# Altium PCB Player.PcbDoc (part 2 of 2)
Units mil, origin at the board's own origin, x right, y up, seen from the top; angles counter-clockwise.
Board outline 1181.1 x 2755.91 mil, 6 copper layers (Top Layer, Mid-Layer 1, Mid-Layer 2, Mid-Layer 3, Mid-Layer 4, Bottom Layer); 169 components, 289 nets, 1099 pads, 96 vias.
Unrouted connection lines stored in the file: 590.
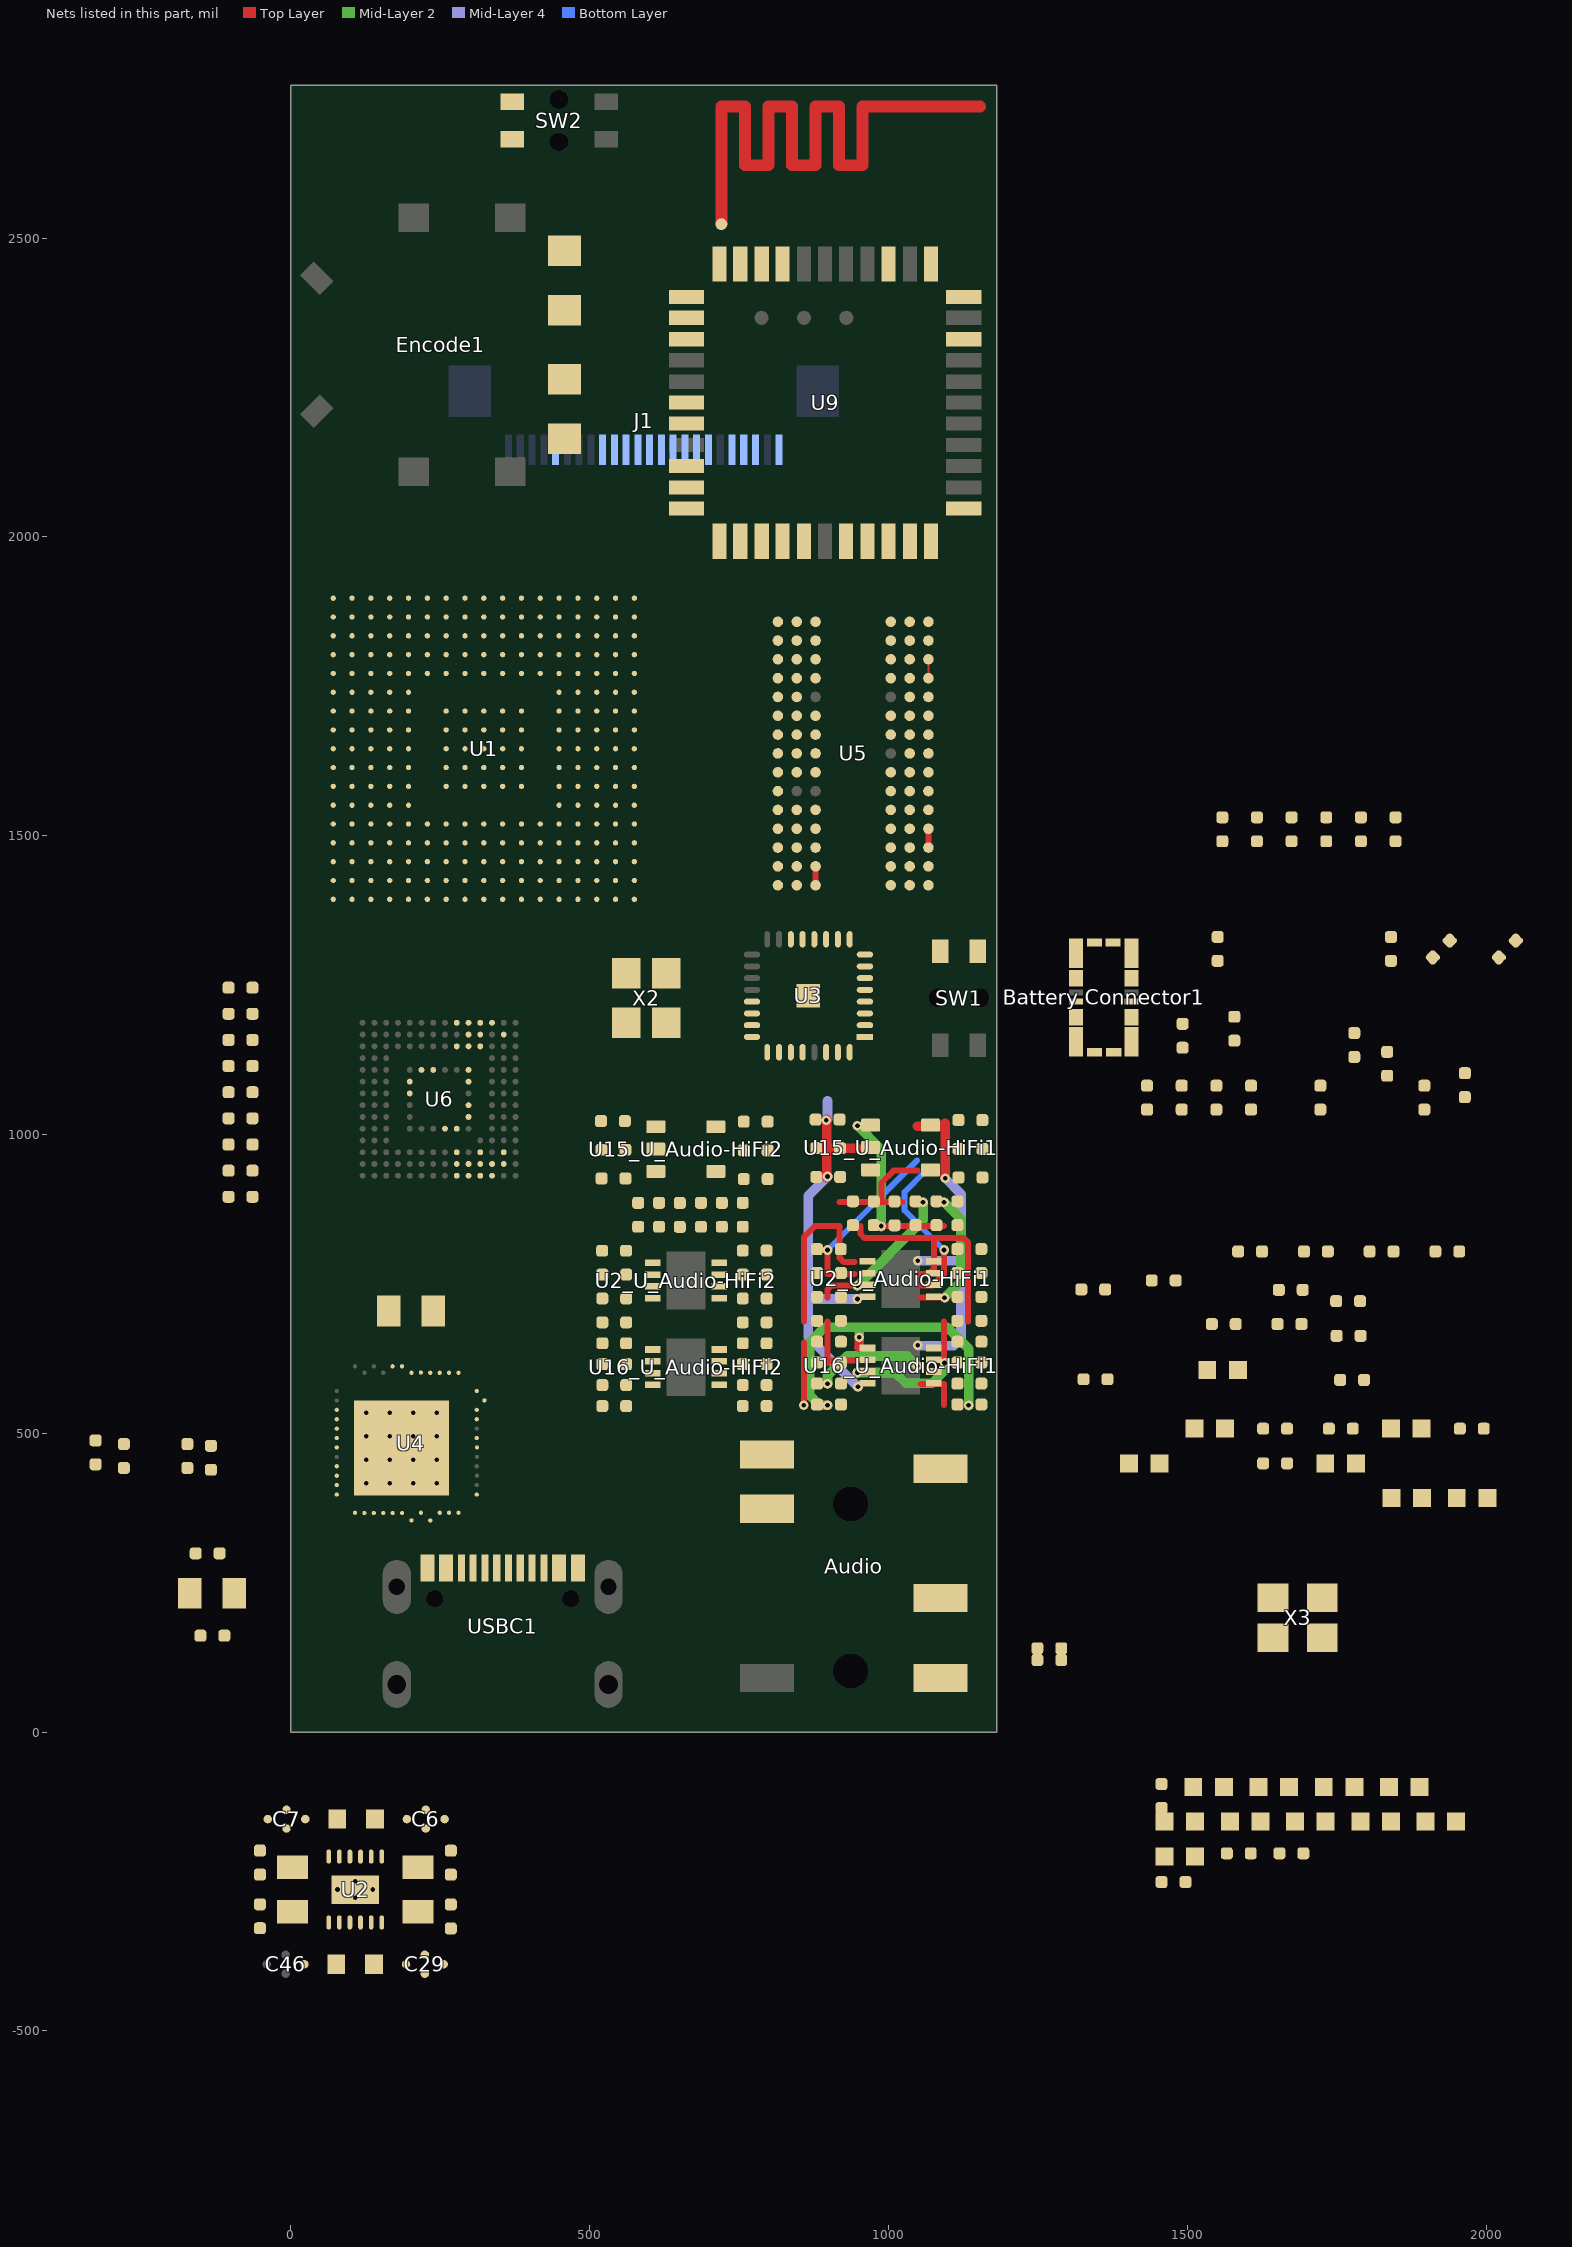
[diagram p4: the nets of this part, all layers, seen from the top]

## Part data
ANT1: "PCB板载天线", BOM名称=PCB板载天线, 当前库版本V2023.8.14 @淘宝卖家:黄晶宝石=最新版本发布https://item.taobao.com/item.htm?id=566775463719, 联系下单店铺卖家 免费技术支持="联系下单店铺卖家 免费帮你查找封装"
Audio: "3.5耳机插座,4Pin", BOM名称=耳机插座, 当前库版本V2023.8.14 @淘宝卖家:黄晶宝石=最新版本发布https://item.taobao.com/item.htm?id=566775463719
B1 B2: library part BEAD
"Battery Connector1": library part BM25-4S/2-V-51, "Battery"
C1 C2 C3 C4 C5 C8 C9 C10 C11 C12 C13 C14 C15 C16 C17 C18 C19 C20 C20_U_Audio-HiFi1 C20_U_Audio-HiFi2 C21 C22 C23 C24 C25 C26 C27 C28 C30 C31 C32 C33 C34 C35 C36 C37 C38 C39 C40 C40_U_Audio-HiFi1 C40_U_Audio-HiFi2 C41 C42 C43 C44 C45 C53_U_Audio-HiFi1 C53_U_Audio-HiFi2 C58 C59 C60 C61 C62 C63 C64 C65 C66 C67 C68 C69 C70 C71 C72 C72_U_Audio-HiFi1 C72_U_Audio-HiFi2 C73 C73_U_Audio-HiFi1 C73_U_Audio-HiFi2 C74 C74_U_Audio-HiFi1 C74_U_Audio-HiFi2 C75 C75_U_Audio-HiFi1 C75_U_Audio-HiFi2 C76 C76_U_Audio-HiFi1 C76_U_Audio-HiFi2 C77 C77_U_Audio-HiFi1 C77_U_Audio-HiFi2 C78 C78_U_Audio-HiFi1 C78_U_Audio-HiFi2 C83_U_Audio-HiFi1 C83_U_Audio-HiFi2 C84_U_Audio-HiFi1 C84_U_Audio-HiFi2: library part 电容-0402, "Capacitor"
C6 C7 C29 C46: library part CMP-06053-000028-1, "CAP FEEDTHRU 1UF 20% 6.3V 0603", Capacitance=1uF, Case Code (Imperial)=0603, Case Code (Metric)=1608, Current=2A, DC Resistance (DCR)=30mR, Max Operating Temperature=125°C, Min Operating Temperature=-55°C, Package Quantity=4000, Tolerance=20%, Voltage Rating=6.3V, Case/Package=0603, Height=0.028inch, Length=0.063inch, Mount="Surface Mount", Packaging="Tape and Reel", Voltage Rating (DC)=6.3V, Width=0.031inch
Encode1: JLCPCB Part Class="Extended Part", LCSC Part Name=拨轮滚轮旋转编码器开关, Manufacturer=MITSUMI(美上美), Add into BOM=yes, Convert to PCB=yes, Datasheet=https://atta.szlcsc.com/upload/public/pdf/source/20220728/2FBC1A98A06DC86460FC69DAE20456FC.pdf, DEVICE=SIQ-02FVS3, Manufacturer Part=SIQ-02FVS3, Supplier=LCSC, Supplier Footprint=SMD, Supplier Part=C2925423, Symbol=SIQ-02FVS3
J1: "鱼鹰光电"
L1 L2 L3 L4: library part L, "贴片小功率电感", BOM名称=小功率贴片电感, 联系下单店铺卖家 免费帮你查找封装="联系下单店铺卖家 免费技术支持"
R1 R2 R8 R9 R10 R11 R12 R15 R16 R17 R17_U_Audio-HiFi1 R17_U_Audio-HiFi2 R18 R19 R19_U_Audio-HiFi1 R19_U_Audio-HiFi2 R20 R20_U_Audio-HiFi1 R20_U_Audio-HiFi2 R21 R22 R23 R24 R24_U_Audio-HiFi1 R24_U_Audio-HiFi2 R25_U_Audio-HiFi1 R25_U_Audio-HiFi2 R27_U_Audio-HiFi1 R27_U_Audio-HiFi2 R34_U_Audio-HiFi1 R34_U_Audio-HiFi2 R36_U_Audio-HiFi1 R36_U_Audio-HiFi2 R37_U_Audio-HiFi1 R37_U_Audio-HiFi2 R55_U_Audio-HiFi1 R55_U_Audio-HiFi2 R56_U_Audio-HiFi1 R56_U_Audio-HiFi2 R57_U_Audio-HiFi1 R57_U_Audio-HiFi2 R60_U_Audio-HiFi1 R60_U_Audio-HiFi2 R61_U_Audio-HiFi1 R61_U_Audio-HiFi2 R63_U_Audio-HiFi1 R63_U_Audio-HiFi2 R65_U_Audio-HiFi1 R65_U_Audio-HiFi2: library part R, "贴片电阻", BOM名称=贴片电阻
  R1 R2 R8 R9 R10 R11 R12 R15 R16 R17 R18 R19 R20 R21 R22 R23 R24: 联系卖家，免费查找封装=唯一出售店铺网址https://shop463601444.taobao.com
  R17_U_Audio-HiFi1 R17_U_Audio-HiFi2 R19_U_Audio-HiFi1 R19_U_Audio-HiFi2 R20_U_Audio-HiFi1 R20_U_Audio-HiFi2 R24_U_Audio-HiFi1 R24_U_Audio-HiFi2 R25_U_Audio-HiFi1 R25_U_Audio-HiFi2 R27_U_Audio-HiFi1 R27_U_Audio-HiFi2 R34_U_Audio-HiFi1 R34_U_Audio-HiFi2 R36_U_Audio-HiFi1 R36_U_Audio-HiFi2 R37_U_Audio-HiFi1 R37_U_Audio-HiFi2 R55_U_Audio-HiFi1 R55_U_Audio-HiFi2 R56_U_Audio-HiFi1 R56_U_Audio-HiFi2 R57_U_Audio-HiFi1 R57_U_Audio-HiFi2 R60_U_Audio-HiFi1 R60_U_Audio-HiFi2 R61_U_Audio-HiFi1 R61_U_Audio-HiFi2 R63_U_Audio-HiFi1 R63_U_Audio-HiFi2 R65_U_Audio-HiFi1 R65_U_Audio-HiFi2: 联系下单店铺卖家 免费帮你查找封装="联系下单店铺卖家 免费技术支持"
SW1 SW2: "小乌龟-侧按4脚开关 带定位柱", 联系下单店铺卖家 免费技术支持="联系下单店铺卖家 免费帮你查找封装"
U1: library part CMP-12105-000055-1, "HIGH-PERFORMANCE AND DSP WITH DP", Ambient Temperature Range High=+85°C, Ambient Temperature Range Low=-40°C, Frequency=480MHz, Manufacturer=STMicroelectronics, Max Junction Temp=+125°C, Max Supply Voltage=3.6V, Min Supply Voltage=1.2V, Package=TFBGA240+25-A07U, Temperature="-40°C to +125°C", Automotive=No, Category=IC, ComponentLink2Description=Datasheet, ComponentLink2URL=https://www.st.com/resource/en/datasheet/stm32h747xi.pdf, Core Architecture="ARM Cortex-M4, ARM Cortex-M7", Data Bus Width=32bits, Device Class L1="Integrated Circuits (ICs)", Device Class L2="Embedded Processors and Controllers", Device Class L3=Microcontrollers, Digikey Description="HIGH-PERFORMANCE AND DSP WITH DP", Height=1.1mm, Interface=I2C,SPI,UART,USART,CAN,USB,LIN,IrDA,Ethernet,I2S,SMBus,Other, Ipc Land Pattern Name=BGA289N80P17X17_1400X1400X110, Lead Free=Yes, Manufacturer Part Number=STM32H747XIH6, Memory Size=2MBytes, Memory Type=FLASH, Mouser Description="STM32 Series 2 MB Flash 1 MB RAM 480 MHz 32-Bit Microcontroller - TFBGA-265", Number Of A/D Converters=3, Number Of Adc Channels=36, Number Of Cores=2, Number Of Ethernet Channels=1, Number Of I2C Channels=4, Number Of I/Os=168, Number Of Pwm Channels=2, Number Of Spi Channels=6, Number Of Timers/Counters=22, Number Of Uart Channels=9, Number Of Usb Channels=2, Octopart=https://octopart.com/stm32h747xih6-stmicroelectronics-100293943, Ram Size=1MBytes, RoHS=TRUE, Standoff Height=0.15mm, Temperature Range High=+125°C, Temperature Range Low=-40°C
U2: library part CMP-04918-000430-1, "IC REG AMOLED DISPL 2OUT 12WSON", Case/Package=QFN, Max Operating Temperature=85°C, Max Supply Voltage=5V, Min Operating Temperature=-40°C, Min Supply Voltage=2.9V, Output Voltage=-5V, Package Quantity=3000, Lead Free="Lead Free", Mount="Surface Mount", Number of Channels=2, Number of Outputs=2, Number of Pins=12, Packaging="Tape and Reel", Radiation Hardening=No, RoHS Compliant=Yes
U2_U_Audio-HiFi1 U2_U_Audio-HiFi2 U16_U_Audio-HiFi1 U16_U_Audio-HiFi2: "Double Channel Low Power Operational Amplifier, 145 MHz BW, 180 V/us SR, Industrial, 8-pin SOIC (R-8), Reel", Amplifiers Per Package=2, Generic Part Number=AD8066, Input Bias Current=2pA, Input Offset Voltage=400uV, Manufacturer="Analog Devices", Code_JEDEC=MS-012-AA, ComponentLink1Description="Manufacturer URL", ComponentLink1URL=http://www.analog.com/en/index.html, ComponentLink2Description=Datasheet, ComponentLink2URL=http://www.analog.com/static/imported-files/data_sheets/AD8065_8066.pdf, ComponentLink3Description="Package Specification", ComponentLink3URL=http://www.analog.com/static/imported-files/packages/PKG_PDF/SOIC_Narrow%20(R)/R_8.pdf, ComponentLink4Description="Reference Circuit", ComponentLink4URL=http://www.analog.com/en/all-operational-amplifiers-op-amps/operational-amplifiers-op-amps/ad8066/products/product.html#product-recommendations, DatasheetVersion="Rev. J", Iq/Amp=7.4mA, Mounting Technology="Surface Mount", PackageDescription="8-Pin Standard Small Outline Package, Body 3.9 x 4.9 mm, Pitch 1.27 mm", PackageReference=R-8, PackageVersion=060506-A, PartNumber=AD8066ARZ-R7, RevisionNote="Reference Circuit URL fixed", Slew Rate=180V/us, Small Signal Bandwidth=145MHz, V Span Max=24V, V Span Min=5V
U4: library part CMP-1518-00018-3, "IC PMIC BATT PWR SYST 48VQFN", Case/Package=VQFN, Max Operating Temperature=105°C, Min Operating Temperature=-40°C, Nominal Supply Current=2.5A, Operating Supply Voltage=5.8V, Output Current=1.2A, Output Voltage=3.3V, Package Quantity=2500, Lead Free="Lead Free", Max Duty Cycle=100%, Mount="Surface Mount", Number of Outputs=7, Number of Pins=48, Packaging="Tape and Reel", Radiation Hardening=No, RoHS Compliant=Yes
U5: JLCPCB Part Class="Extended Part", Manufacturer=ISSI(美国芯成), Add into BOM=yes, Convert to PCB=yes, Datasheet=https://atta.szlcsc.com/upload/public/pdf/source/20220614/2E4F120B9DE0CAEE6B87FE9099754B7F.pdf, DEVICE=IS42S32800G-6BLI, LCSC Part Name=IS42S32800G-6BLI, Manufacturer Part=IS42S32800G-6BLI, Name=IS42S32800G-6BLI, Supplier=LCSC, Supplier Footprint=TFBGA-90(8x13), Supplier Part=C2920767, Symbol=IS42S32800G-6BLI
U6: Manufacturer=SAMSUNG(三星半导体), Add into BOM=yes, Convert to PCB=yes, Datasheet=https://atta.szlcsc.com/upload/public/pdf/source/20240221/0DCF3FBB535A67C02EC39E54F7AEA7E4.pdf, DEVICE=KLM8G1GETF-B041006_1, LCSC Part Name=KLM8G1GETF-B041006, Manufacturer Part=KLM8G1GETF-B041006, Supplier=LCSC, Supplier Footprint=FBGA-153(11.5x13), Supplier Part=C20622996, Symbol=KLM8G1GETF-B041006_C20622996
U9: "WiFi & BT Module"
U15_U_Audio-HiFi1 U15_U_Audio-HiFi2: library part CMP-0055-01252-3, "Single/ Dual Ultra Low Noise Wideband Operational Amplifier, 5-pin SOT-23, Pb-Free", Manufacturer="Texas Instruments", Package Reference=DBV0005A, PackageTopMarking=A94A*XTT, PowerWise=Y, ComponentLink1Description="Datasheet URL", ComponentLink1URL=http://www.ti.com/general/docs/lit/getliterature.tsp?genericPartNumber=LMH6624&fileType=pdf, CompType=Amplifiers, PackageDescription="Molded SOT-23, .115 x .063 x .040 in Body, 5 Lead, .0375 in Pitch", PinCount=5, RoHS=Y
USBC1: library part "USB-Tyoe-C 16P-2.0", "type-C-16pin"
X2 X3: library part XTAL-4P, "4脚无源晶振(谐振器）", BOM名称=4脚无源晶振(谐振器）, 联系下单店铺卖家 免费帮你查找封装="联系下单店铺卖家 免费技术支持"

## Via types
v1: diameter 16, hole 8, Top Layer to Bottom Layer, tented both sides, 76 vias
v2: diameter 19.68, hole 7.87, Top Layer to Bottom Layer, 20 vias

## Nets (pads, with @x,y where several pads share a name; then routed paths per layer and width w, separated by ;. In a path a pad name is that pad's centre, name@x,y a point inside that pad or via, vN(x,y) a via of type N, cw(c..) or ccw(c..) an arc to the next point about the centre after c; other vN are vias at no path point)
Audio_DAC1_N: C20_U_Audio-HiFi1.2 R17_U_Audio-HiFi1.1 U2_U_Audio-HiFi1.2 U3.2 | length 296.8
  Top Layer w10: v1@898.28,807.06 898.28,767.06 942.71,767.06 942.87,766.9
  Bottom Layer w10: v1(898,806.88) 1048,956.88
Audio_DAC1_P: C75_U_Audio-HiFi1.1 R37_U_Audio-HiFi1.2 U2_U_Audio-HiFi1.6 U3.3 | length 261.7
  Top Layer w10: 1053.69,747.22 1073.44,747.22 1093.28,767.06 v1@1093.28,807.06
  Bottom Layer w10: 1062,938.95 1027,903.95 1027,872.88 v1(1093,806.88)
Audio_DAC2_N: C20_U_Audio-HiFi2.2 R17_U_Audio-HiFi2.1 U2_U_Audio-HiFi2.2 U3.6
Audio_DAC2_P: C75_U_Audio-HiFi2.1 R37_U_Audio-HiFi2.2 U2_U_Audio-HiFi2.6 U3.7
Audio_GPIO1: U3.28
Audio_GPIO2: U3.27
Audio_GPIO3: U1.H17 U3.26
Audio_GPIO4: U1.C8 U3.25
Audio_GPIO5: U1.B8 U3.24
Audio_GPIO6: U1.A8 U3.23
Audio_GPIO7: U1.C7 U3.22
Audio_GPIO8: U1.D7 U3.21
Audio_SW1: Audio.5
Audio_SW2: Audio.6
Audio_VO1: Audio.3 C76_U_Audio-HiFi1.1 R56_U_Audio-HiFi1.2 R57_U_Audio-HiFi1.2 R61_U_Audio-HiFi1.1 | length 105
  Top Layer w10: v1(858.28,547.06) 858.28,652.06
Audio_VO2: Audio.4 C76_U_Audio-HiFi2.1 R56_U_Audio-HiFi2.2 R57_U_Audio-HiFi2.2 R61_U_Audio-HiFi2.1
AudioPWR_EN: U2.7
BATT_ID: "Battery Connector1.4"
BATT_TS: "Battery Connector1.3" R11.1 U4.11
BOOT0: R10.2 U1.E8
BT_HOST_WAKE: R22.2 U9.7
BT_R\S\T\: R21.2 U9.34
BT_UART_C\T\S\: R24.2 U9.44
BT_UART_R\T\S\: R23.2 U9.41
BT_UART_RXD: U9.43
BT_UART_TXD: U9.42
BT_WAKE: R20.2 U9.6
DCDC_VCC_Audio: C5.2 C6.1 U2.3
DCDC_VEE_Audio: C4.2 C29.1 U2.9
DSI_CK_N: U1.L17
DSI_CK_P: U1.L16
DSI_D0_N: U1.M17
DSI_D0_P: U1.M16
DSI_D1_N: U1.K17
DSI_D1_P: U1.K16
ENC_A: C43.1 Encode1.A
ENC_B: C45.1 Encode1.B
ENC_S: C44.1 Encode1.S U1.E4
FMC_A0: U1.G4 U5.G8
FMC_A1: U1.G3 U5.G9
FMC_A2: U1.G1 U5.F7
FMC_A3: U1.H4 U5.F3
FMC_A4: U1.J5 U5.G1
FMC_A5: U1.J4 U5.G2
FMC_A6: U1.R7 U5.G3
FMC_A7: U1.P7 U5.H1
FMC_A8: U1.P8 U5.H2
FMC_A9: U1.R9 U5.J3
FMC_A10: U1.T8 U5.G7
FMC_A11: U1.U8 U5.H9
FMC_A12: U5.H3
FMC_A14: U1.H14 U5.J7
FMC_A15: U1.G14 U5.H8
FMC_D0: U1.P16 U5.R8
FMC_D1: U1.P15 U5.N7
FMC_D2: U1.D13 U5.R9
FMC_D3: U1.E12 U5.N8
FMC_D4: U1.U9 U5.P9
FMC_D5: U1.T9 U5.M8
FMC_D6: U1.P9 U5.M7
FMC_D7: U1.N9 U5.L8
FMC_D8: U1.P10 U5.L2
FMC_D9: U1.R10 U5.M3
FMC_D10: U1.T10 U5.M2
FMC_D11: U1.U10 U5.P1
FMC_D12: U1.R11 U5.N2
FMC_D13: U1.U16 U5.R1
FMC_D14: U1.T17 U5.N3
FMC_D15: U1.T16 U5.R2
FMC_D16: U1.T13 U5.E8
FMC_D17: U1.R13 U5.D7
FMC_D18: U1.P13 U5.D8
FMC_D19: U1.P14 U5.B9
FMC_D20: U1.R14 U5.C8
FMC_D21: U1.D16 U5.A9
FMC_D22: U1.B17 U5.C7
FMC_D23: U1.B16 U5.A8
FMC_D24: U1.A16 U5.A2
FMC_D25: U1.A15 U5.C3
FMC_D26: U1.B15 U5.A1
FMC_D27: U1.C14 U5.C2
FMC_D28: U1.A2 U5.B1
FMC_D29: U1.B3 U5.D2
FMC_D30: U1.E2 U5.D3
FMC_D31: U1.F3 U5.E2
FMC_NBL0: U1.C4 U5.K9
FMC_NBL1: U1.B4 U5.K1
FMC_NBL2: U1.A4 U5.F8
FMC_NBL3: U1.A3 U5.F2
FMC_SDC\A\S\: U1.D6 U5.K7
FMC_SDC\S\1: U1.T11 U5.J8
FMC_SDCKE1: U1.U13 U5.J2
FMC_SDCLK: U1.F15 U5.J1
FMC_SDR\A\S\: U1.T7 U5.J9
FMC_SDW\E\: U1.L2 U5.K8
I2S1_CK: U1.T3 U3.12
I2S1_MCK: U1.T4 U3.32
I2S1_SDO: U1.R5 U3.14
I2S1_WS: U1.U3 U3.13
LCD_CS: J1.12 U1.J15
LCD_DC: J1.11 U1.N15
LCD_MOSI: J1.14 U1.L14
LCD_RST: J1.10 U1.R12
LCD_SCK: J1.13 U1.J14
LCD_TE: J1.9
MCU_USB_N: U1.E17
MCU_USB_P: U1.E16
NetANT1_1: ANT1.1 C75.2
NetB1_1: B1.1 C7.1
NetB1_2: B1.2 C6.3
NetB2_1: B2.1 C46.1
NetB2_2: B2.2 C29.3
NetC1_1: C1.1 U3.9
NetC20_U_Audio-HiFi1_1: C20_U_Audio-HiFi1.1 R17_U_Audio-HiFi1.2 R20_U_Audio-HiFi1.1 R25_U_Audio-HiFi1.1 R55_U_Audio-HiFi1.1 U2_U_Audio-HiFi1.1 | length 289.9
  Top Layer w10: 858.28,687.06 858.28,767.06 858.28,807.06 858.28,828.17 877.18,847.06 918.28,847.06 918.28,793.6 925.29,786.59 942.87,786.59
NetC20_U_Audio-HiFi2_1: C20_U_Audio-HiFi2.1 R17_U_Audio-HiFi2.2 R20_U_Audio-HiFi2.1 R25_U_Audio-HiFi2.1 R55_U_Audio-HiFi2.1 U2_U_Audio-HiFi2.1
NetC36_1: C36.1 U4.47
NetC37_1: C37.1 U4.48
NetC58_1: C58.1 U6.C2
NetC68_2: C68.2 J1.5
NetC70_2: C70.2 J1.18
NetC71_2: C71.2 J1.20
NetC72_2: C72.2 J1.21
NetC73_2: C73.2 J1.22
NetC74_2: C74.2 J1.24
NetC74_U_Audio-HiFi1_1: C74_U_Audio-HiFi1.1 R24_U_Audio-HiFi1.2 R25_U_Audio-HiFi1.2 R27_U_Audio-HiFi1.1 U15_U_Audio-HiFi1.4 | length 205.6
  Top Layer w10: 918.28,887.06 953.28,887.06 988.28,887.06 ; 1023.28,887.06 988.28,887.06 ; 1048.2,939.48 1048.02,939.66 1008.78,939.66 988.28,919.17 988.28,887.06
NetC74_U_Audio-HiFi1_2: C74_U_Audio-HiFi1.2 R19_U_Audio-HiFi1.1 R24_U_Audio-HiFi1.1 R36_U_Audio-HiFi1.1 U15_U_Audio-HiFi1.1 | length 290.6
  Top Layer w10: v1@988.28,847.06 1093.28,847.06
  Mid-Layer 2 w16: v1(948,1014.88) 988,974.88 v1@988,845.88
  other v1: 988,846.88
NetC74_U_Audio-HiFi2_1: C74_U_Audio-HiFi2.1 R24_U_Audio-HiFi2.2 R25_U_Audio-HiFi2.2 R27_U_Audio-HiFi2.1 U15_U_Audio-HiFi2.4
NetC74_U_Audio-HiFi2_2: C74_U_Audio-HiFi2.2 R19_U_Audio-HiFi2.1 R24_U_Audio-HiFi2.1 R36_U_Audio-HiFi2.1 U15_U_Audio-HiFi2.1
NetC75_1: C75.1 U9.2
NetC75_U_Audio-HiFi1_2: C75_U_Audio-HiFi1.2 R27_U_Audio-HiFi1.2 R34_U_Audio-HiFi1.2 R37_U_Audio-HiFi1.1 R63_U_Audio-HiFi1.1 U2_U_Audio-HiFi1.7 | length 408.7
  Top Layer w10: 953.28,847.06 953.28,833.6 960.14,826.74 1076,826.74 ; 1053.69,766.9 1067.02,766.9 1076,775.88 1076,826.74 ; 1133.28,687.06 1133.28,727.06 1133.28,807.06 1133.28,819.69 1126.24,826.74 1076,826.74
NetC75_U_Audio-HiFi2_2: C75_U_Audio-HiFi2.2 R27_U_Audio-HiFi2.2 R34_U_Audio-HiFi2.2 R37_U_Audio-HiFi2.1 R63_U_Audio-HiFi2.1 U2_U_Audio-HiFi2.7
NetC76_2: C76.2 U9.21 U9.23
NetC76_U_Audio-HiFi1_2: C76_U_Audio-HiFi1.2 R55_U_Audio-HiFi1.2 R56_U_Audio-HiFi1.1 U16_U_Audio-HiFi1.2 | length 116.6
  Top Layer w10: 898.28,687.06 898.28,652.06 898.28,617.06 903.12,621.9 942.87,621.9
NetC76_U_Audio-HiFi2_2: C76_U_Audio-HiFi2.2 R55_U_Audio-HiFi2.2 R56_U_Audio-HiFi2.1 U16_U_Audio-HiFi2.2
NetC77_1: C77.1 U9.10 X3.1
NetC77_U_Audio-HiFi1_2: C77_U_Audio-HiFi1.2 R60_U_Audio-HiFi1.2 U16_U_Audio-HiFi1.5 | length 74.8
  Top Layer w10: 1053.69,582.53 1092.81,582.53 1093.28,582.06 1093.28,547.06
NetC77_U_Audio-HiFi2_2: C77_U_Audio-HiFi2.2 R60_U_Audio-HiFi2.2 U16_U_Audio-HiFi2.5
NetC78_1: C78.1 U9.11 X3.3
NetC78_U_Audio-HiFi1_2: C78_U_Audio-HiFi1.2 R63_U_Audio-HiFi1.2 R65_U_Audio-HiFi1.1 U16_U_Audio-HiFi1.3 | length 245.1
  Top Layer w10: v1@1093.28,617.06 1093.28,687.06
  Mid-Layer 2 w16: v1(948,601.88) 1011,601.88 1029,583.88 1072.99,583.88 1094,604.9 v1(1094,617.88)
NetC78_U_Audio-HiFi2_2: C78_U_Audio-HiFi2.2 R63_U_Audio-HiFi2.2 R65_U_Audio-HiFi2.1 U16_U_Audio-HiFi2.3
NetL1_1: L1.1 U2.1
NetL2_1: L2.1 U4.23
NetL3_1: L3.1 U4.31
NetL4_1: L4.1 U2.10
NetR1_1: R1.1 USBC1.A5
NetR2_1: R2.1 USBC1.B5
NetR19_U_Audio-HiFi1_2: R19_U_Audio-HiFi1.2 R20_U_Audio-HiFi1.2 U2_U_Audio-HiFi1.3 | length 246.5
  Top Layer w10: 898.28,727.06 898.28,740.77 904.73,747.22 v1@942.87,747.22
  Mid-Layer 2 w16: v1(948,746.88) 1058,856.88 v1(1058,886.88)
NetR19_U_Audio-HiFi2_2: R19_U_Audio-HiFi2.2 R20_U_Audio-HiFi2.2 U2_U_Audio-HiFi2.3
NetR34_U_Audio-HiFi1_1: R34_U_Audio-HiFi1.1 R36_U_Audio-HiFi1.2 U2_U_Audio-HiFi1.5 | length 222.6
  Top Layer w10: 1053.69,727.53 1092.81,727.53 v1@1093.28,727.06
  Mid-Layer 2 w16: v1(1093,886.88) 1121,858.88 1121,753.88 v1(1094,726.88)
NetR34_U_Audio-HiFi2_1: R34_U_Audio-HiFi2.1 R36_U_Audio-HiFi2.2 U2_U_Audio-HiFi2.5
NetR57_U_Audio-HiFi1_1: R57_U_Audio-HiFi1.1 R60_U_Audio-HiFi1.1 U16_U_Audio-HiFi1.1 | length 546.3
  Top Layer w16: 950.72,644.39 951,644.67 v1(951,660.88)
  Mid-Layer 2 w16: v1(898,546.88) 885,546.88 868,563.88 868,651.88 894,677.88 1098,677.88 1134,641.88 v1@1134,545.88 ; v1(951,660.88) 951,677.88
  other v1: 1134,546.88
NetR57_U_Audio-HiFi2_1: R57_U_Audio-HiFi2.1 R60_U_Audio-HiFi2.1 U16_U_Audio-HiFi2.1
NetR61_U_Audio-HiFi1_2: R61_U_Audio-HiFi1.2 U16_U_Audio-HiFi1.6 U16_U_Audio-HiFi1.7 | length 184.1
  Mid-Layer 2 w16: v1(898,582.88) 898,596.48 930.96,629.44 1031.45,629.44 v1(1048,612.88)
NetR61_U_Audio-HiFi2_2: R61_U_Audio-HiFi2.2 U16_U_Audio-HiFi2.6 U16_U_Audio-HiFi2.7
OSC_IN: C28.1 U1.J2 X2.3
OSC_OUT: C27.1 U1.J1 X2.1
PA0: U1.N5 U6.M5
PA0_C: U1.T1
PA1: U1.N4
PA1_C: U1.T2
PA2: U1.N3
PA2_C: U1.R1
PA3: U1.U2
PA3_C: U1.R2
PA6: U1.R3
PA8: U1.E15
PA9: U1.D15
PA10: U1.D14
PA13: U1.C15
PA14: U1.B14
PA15: U1.A14
PB0: U1.U5
PB1: U1.T5
PB2: U1.R6
PB3: U1.C6 U6.A5
PB4: U1.B7 U6.B2
PB5: U1.A5
PB6: U1.B5 U4.28
PB7: U1.C5 U4.27
PB8: U1.D5 U4.45
PB9: R12.1 U1.D4 U4.9
PB10: U1.P11
PB11: U1.P12
PB12: U1.T14
PB13: U1.U14
PB14: U1.U15 U6.A3
PB15: U1.T15 U6.A4
PC1: U1.M2
PC2: U1.M3
PC3: U1.M4
PC5: U1.U4
PC6: U1.F14
PC7: U1.F13
PC8: U1.E13
PC9: U1.E14
PC10: U1.A13
PC11: U1.B13
PC12: U1.C12
PC13: U1.E3 U4.13
PC14: U1.C2
PC15: U1.C1
PD2: U1.D12
PD3: U1.B12
PD4: U1.A12
PD5: U1.A11
PD6: U1.B11 U6.M6
PD7: U1.C11
PD11: U1.R15
PD12: U1.R16
PD13: U1.R17
PDR_ON: R8.1 U1.E7
PE2: U1.C3
PE3: U1.D3
PE4: U1.D2
PE5: U1.D1
PE6: U1.E5
PF6: U1.K2
PF7: U1.K3
PF8: U1.K4
PF9: U1.L4
PF10: U1.L3
PG2: U1.H16
PG3: U1.H15
PG6: U1.G15
PG7: U1.F16
PG9: U1.A10
PG10: U1.A9
PG11: U1.B9
PG12: U1.C9
PG13: U1.D9
PG14: U1.D8
PH2: U1.N2
PH3: U1.P2
PH4: U1.P3
PH5: U1.P4
PI11: U1.F4
PI12: U1.H1
PI13: U1.H2
PI14: U1.H3
PI15: U1.P5
PJ0: U1.N6
PJ1: U1.P6
PJ2: U1.T6
PJ3: U1.U6
PJ4: U1.U7
PJ7: U1.N14
PJ8: U1.N13
PJ9: U1.M14
PJ11: U1.K14
PJ12: U1.D11
PJ13: U1.E10
PJ14: U1.D10
PJ15: U1.B10
PMU_LDOPGOOD: U4.46
PMU_PB: SW1.1 U4.25
PMU_PGOOD: U4.26
R\E\S\E\T\: C26.1 R9.1 SW2.1 U1.K1
SBU1: USBC1.A8
SBU2: USBC1.B8
SDMMC2_D4: U6.B3
SDMMC2_D5: U6.B4
SDMMC2_D6: U6.B5
SDMMC2_D7: U6.B6
USB_N: USBC1.A7 USBC1.B7
USB_P: USBC1.A6 USBC1.B6
VAudio: C2.2 C3.2 L1.2 U2.11 U2.12
VBATT: "Battery Connector1.1" "Battery Connector1.2" "Battery Connector1.9" "Battery Connector1.10" "Battery Connector1.13" "Battery Connector1.14" U4.4 U4.5 U4.6
VBUS: U4.10 U4.12 USBC1.A4 USBC1.A9 USBC1.B4 USBC1.B9
VCC_U_Audio-HiFi1: C7.3 C40_U_Audio-HiFi1.1 C40_U_Audio-HiFi2.1 C53_U_Audio-HiFi1.1 C53_U_Audio-HiFi2.1 C72_U_Audio-HiFi1.1 C72_U_Audio-HiFi2.1 U2_U_Audio-HiFi1.8 U2_U_Audio-HiFi2.8 U15_U_Audio-HiFi1.5 U15_U_Audio-HiFi2.5 U16_U_Audio-HiFi1.8 U16_U_Audio-HiFi2.8 | length 565.6
  Top Layer w16: 1048.2,1014.28 1089.4,1014.28 1094,1018.88 ; v1@1094,928.88 1095,929.88 1095,974.88 1095,1018.88
  Mid-Layer 4 w16: v1(1049,788.88) 1120,788.88 1121,787.88 ; v1@1050,646.88 1109,646.88 1121.4,659.28 1121.4,900.48 v1(1095,926.88)
  other v1: 1049.08,647.32
VDCDC1: C32.1 U4.19
VDCDC2: C22.2 C23.2 C24.2 C33.1 L2.2 U1.A7 U1.D17 U1.U11 U4.24
VDCDC3: C34.1 L3.2 U4.29
VDDCAPDSI: C20.2 C21.2 U1.N17
VEE_U_Audio-HiFi1: C73_U_Audio-HiFi1.2 C73_U_Audio-HiFi2.2 C83_U_Audio-HiFi1.2 C83_U_Audio-HiFi2.2 C84_U_Audio-HiFi1.2 C84_U_Audio-HiFi2.2 U2_U_Audio-HiFi1.4 U2_U_Audio-HiFi2.4 U15_U_Audio-HiFi1.2 U15_U_Audio-HiFi2.2 U16_U_Audio-HiFi1.4 U16_U_Audio-HiFi2.4 | length 665.3
  Top Layer w16: 894,976.88 947.8,976.88 ; v1@897,927.88 897,975.88 v1@897,1025.88
  Mid-Layer 4 w16: 868,724.88 v1(948,724.88) ; v1(896,1023.88) 898,1025.88 898,1056.88 ; v1(898,929.88) 866,897.88 866,660.88 v1(949,577.88)
VFBSMPS: "Battery Connector1.7" "Battery Connector1.8" "Battery Connector1.11" "Battery Connector1.12" "Battery Connector1.15" "Battery Connector1.16" Audio.1 C1.2 C2.1 C3.1 C4.1 C5.1 C6.2 C7.2 C8.2 C9.2 C10.2 C11.2 C12.2 C13.2 C14.2 C15.2 C16.2 C17.2 C18.2 C19.2 C20.1 C21.1 C22.1 C23.1 C24.1 C25.2 C26.2 C27.2 C28.2 C29.2 C30.2 C31.2 C32.2 C33.2 C34.2 C35.2 C36.2 C37.2 C38.2 C39.1 C40.1 C40_U_Audio-HiFi1.2 C40_U_Audio-HiFi2.2 C41.1 C42.1 C43.2 C44.2 C45.2 C53_U_Audio-HiFi1.2 C53_U_Audio-HiFi2.2 C58.2 C59.2 C60.2 C61.2 C62.2 C63.2 C64.2 C65.2 C66.2 C67.2 C68.1 C69.1 C70.1 C71.1 C72.1 C72_U_Audio-HiFi1.2 C72_U_Audio-HiFi2.2 C73.1 C73_U_Audio-HiFi1.1 C73_U_Audio-HiFi2.1 C74.1 C76.1 C77.2 C77_U_Audio-HiFi1.1 C77_U_Audio-HiFi2.1 C78.2 C78_U_Audio-HiFi1.1 C78_U_Audio-HiFi2.1 C83_U_Audio-HiFi1.1 C83_U_Audio-HiFi2.1 C84_U_Audio-HiFi1.1 C84_U_Audio-HiFi2.1 Encode1.C J1.17 L4.2 R1.2 R2.2 R10.1 R11.2 R23.1 R65_U_Audio-HiFi1.2 R65_U_Audio-HiFi2.2 SW1.2 SW2.2 U1.A1 U1.A17 U1.B2 U1.B6 U1.C10 U1.C13 U1.C16 U1.F2 U1.G2 U1.G7 U1.G8 U1.G9 U1.G10 U1.G11 U1.G16 U1.H7 U1.H8 U1.H9 U1.H10 U1.H11 U1.J3 U1.J7 U1.J8 U1.J9 U1.J10 U1.J11 U1.J16 U1.J17 U1.K7 U1.K8 U1.K9 U1.K10 U1.K11 U1.K15 U1.L7 U1.L8 U1.L9 U1.L10 U1.L11 U1.L15 U1.M15 U1.N1 U1.N16 U1.P1 U1.R4 U1.R8 U1.T12 U1.U1 U1.U17 U2.2 U2.4 U2.5 U2.6 U2.8 U2.13 U3.4 U3.5 U3.11 U3.30 U3.33 U4.30 U4.41 U4.49 U5.A3 U5.B3 U5.B8 U5.C1 U5.D1 U5.E9 U5.F1 U5.L3 U5.L9 U5.M1 U5.N1 U5.P3 U5.P8 U5.R3 U6.A6 U6.C4 U6.E7 U6.G5 U6.H10 U6.J5 U6.K8 U6.N2 U6.N5 U6.P4 U6.P6 U9.1 U9.3 U9.20 U9.31 U9.33 U9.36 U15_U_Audio-HiFi1.3 U15_U_Audio-HiFi2.3 USBC1.A1 USBC1.A12 USBC1.B1 USBC1.B12 X2.2 X2.4 X3.2 X3.4 | length 31.5
  Top Layer w10: U5.R3@877.95,1417.33 U5.P3@877.95,1448.82
  other v2: 107.67,-277.18 78.14,-263.4 137.2,-263.4 107.67,-249.62 125.98,416.34 165.35,416.34 204.72,416.34 244.09,416.34 125.98,455.71 165.35,455.71 204.72,455.71 244.09,455.71 125.98,495.08 165.35,495.08 204.72,495.08 244.09,495.08 125.98,534.45 165.35,534.45 204.72,534.45 244.09,534.45
VLDO1_1.8V: C39.2 U4.3
VLDO2_3.3V: C40.2 C59.1 C60.1 C61.1 C62.1 C63.1 C64.1 C65.1 C66.1 C67.1 C69.2 J1.15 J1.16 R12.2 U3.1 U3.8 U3.10 U3.31 U4.1 U5.A7 U5.B2 U5.B7 U5.C9 U5.D9 U5.E1 U5.F9 U5.L1 U5.L7 U5.M9 U5.N9 U5.P2 U5.P7 U5.R7 U6.C6 U6.E6 U6.F5 U6.J10 U6.K5 U6.K9 U6.M4 U6.N4 U6.P3 U6.P5 | length 63
  Top Layer w4: U5.D9@1066.92,1763.78 U5.C9@1066.92,1795.28
  Top Layer w10: U5.N9@1066.92,1480.32 U5.M9@1066.92,1511.82
VLDO3_1.8V: C25.1 C41.2 U1.A6 U1.C17 U1.U12 U4.40
VLDO4_3.3V: C8.1 C9.1 C10.1 C11.1 C12.1 C13.1 C14.1 C15.1 C16.1 C17.1 C18.1 C19.1 C42.2 R8.2 R9.2 U1.B1 U1.E6 U1.E9 U1.E11 U1.F1 U1.F5 U1.F17 U1.G5 U1.G13 U1.G17 U1.H5 U1.H13 U1.J13 U1.K5 U1.K13 U1.L1 U1.L5 U1.L13 U1.M1 U1.M5 U1.M13 U1.N7 U1.N8 U1.N10 U1.N11 U1.N12 U1.P17 U4.18 U4.43
VLXSMPS: U1.E1
VSYS: C30.1 C31.1 C35.1 C38.1 U4.2 U4.7 U4.8 U4.21 U4.22 U4.32 U4.39 U4.42
WL_+3V3: R15.1 R16.1 R17.1 R18.1 R19.1 R20.1 R21.1 R22.1 R24.1 U9.9 U9.22
WL_HOST_WAKE: U9.13
WL_REG_ON: U9.12
WL_SDIO_CMD: R19.2 U9.16
WL_SDIO_D0: R15.2 U9.18
WL_SDIO_D1: R16.2 U9.19
WL_SDIO_D2: R17.2 U9.14
WL_SDIO_D3: R18.2 U9.15
pads on no net: "Battery Connector1.5" "Battery Connector1.6" Audio.0 Audio.2 C46.2 C46.3 Encode1.1 Encode1.2 Encode1.3 Encode1.4 Encode1.5 Encode1.6 J1.0 J1.1 J1.2 J1.3 J1.4 J1.6 J1.7 J1.8 J1.19 J1.23 SW1.0 SW1.3 SW1.4 SW2.0 SW2.3 SW2.4 U2_U_Audio-HiFi1.9 U2_U_Audio-HiFi2.9 U3.15 U3.16 U3.17 U3.18 U3.19 U3.20 U3.29 U4.14 U4.15 U4.16 U4.17 U4.20 U4.33 U4.34 U4.35 U4.36 U4.37 U4.38 U4.44 U5.E3 U5.E7 U5.H7 U5.K2 U5.K3 U6.A1 U6.A2 U6.A7 U6.A8 U6.A9 U6.A10 U6.A11 U6.A12 U6.A13 U6.A14 U6.B1 U6.B7 U6.B8 U6.B9 U6.B10 U6.B11 U6.B12 U6.B13 U6.B14 U6.C1 U6.C3 U6.C5 U6.C7 U6.C8 U6.C9 U6.C10 U6.C11 U6.C12 U6.C13 U6.C14 U6.D1 U6.D2 U6.D3 U6.D4 U6.D12 U6.D13 U6.D14 U6.E1 U6.E2 U6.E3 U6.E5 U6.E8 U6.E9 U6.E10 U6.E12 U6.E13 U6.E14 U6.F1 U6.F2 U6.F3 U6.F10 U6.F12 U6.F13 U6.F14 U6.G1 U6.G2 U6.G3 U6.G10 U6.G12 U6.G13 U6.G14 U6.H1 U6.H2 U6.H3 U6.H5 U6.H12 U6.H13 U6.H14 U6.J1 U6.J2 U6.J3 U6.J12 U6.J13 U6.J14 U6.K1 U6.K2 U6.K3 U6.K6 U6.K7 U6.K10 U6.K12 U6.K13 U6.K14 U6.L1 U6.L2 U6.L3 U6.L12 U6.L13 U6.L14 U6.M1 U6.M2 U6.M3 U6.M7 U6.M8 U6.M9 U6.M10 U6.M11 U6.M12 U6.M13 U6.M14 U6.N1 U6.N3 U6.N6 U6.N7 U6.N8 U6.N9 U6.N10 U6.N11 U6.N12 U6.N13 U6.N14 U6.P1 U6.P2 U6.P7 U6.P8 U6.P9 U6.P10 U6.P11 U6.P12 U6.P13 U6.P14 U9.4 U9.5 U9.8 U9.17 U9.24 U9.25 U9.26 U9.27 U9.28 U9.29 U9.30 U9.32 U9.35 U9.37 U9.38 U9.39 U9.40 U9.45 U9.46 U9.47 U16_U_Audio-HiFi1.9 U16_U_Audio-HiFi2.9 USBC1. USBC1.0
copper on no net: | length 5961.9
  Top Layer w8: -51.77,-288.12 -51.77,-238.27 -51.89,-238.15 -39.74,-226 2.67,-226 61.31,-226 63.38,-223.93 63.38,-219.11 ; 2.67,-300.8 6.25,-297.22 57.91,-297.22 63.38,-302.69 63.38,-318.52 ; 22.67,-388.4 76.17,-388.4 ; 24.17,-145.53 77.67,-145.53 ; 63.38,-208.28 63.38,-219.11 ; 81.09,-208.28 81.09,-223.4 67.67,-223.4 63.38,-219.11 ; 98.81,-208.28 98.81,-219.54 109.2,-229.93 208.74,-229.93 212.67,-226 ; 116.53,-208.28 116.53,-187.54 121.67,-182.4 251.67,-182.4 267.67,-198.4 267.67,-156.04 257.16,-145.53 ; 139.17,-388.4 192.67,-388.4 ; 140.66,-145.53 194.17,-145.53 ; 151.96,-208.28 170.55,-208.28 v1(170.67,-208.4) ; 255.66,-388.4 267.67,-376.39 267.67,-328.4
  Top Layer w10: v1(212.67,-300.8) 255.27,-300.8 267.67,-288.4 267.67,-238.4 ; v1(521.16,545.76) 521.16,650.76 ; 521.16,685.76 521.16,765.76 521.16,805.76 521.16,826.87 540.06,845.76 581.16,845.76 581.16,792.3 588.16,785.29 605.75,785.29 ; 561.16,685.76 561.16,650.76 561.16,615.76 566,620.6 605.75,620.6 ; 561.16,725.76 561.16,739.47 567.61,745.92 v1@605.75,745.92 ; v1@561.16,805.76 561.16,765.76 605.59,765.76 605.75,765.6 ; 581.16,885.76 616.16,885.76 651.16,885.76 ; 616.16,845.76 616.16,832.3 623.02,825.44 738.87,825.44 ; v1@651.16,845.76 756.16,845.76 ; 686.16,885.76 651.16,885.76 ; 711.07,938.18 710.89,938.36 671.65,938.36 651.16,917.87 651.16,885.76 ; 716.57,581.23 755.69,581.23 756.16,580.76 756.16,545.76 ; 716.57,726.23 755.69,726.23 v1@756.16,725.76 ; 716.57,745.92 736.32,745.92 756.16,765.76 v1@756.16,805.76 ; 716.57,765.6 729.9,765.6 738.87,774.58 738.87,825.44 ; v1@756.16,615.76 756.16,685.76 ; 796.16,685.76 796.16,725.76 796.16,805.76 796.16,818.39 789.11,825.44 738.87,825.44
  Top Layer w16: 556.87,975.58 610.68,975.58 ; v1@559.87,926.58 559.87,974.58 v1@559.87,1024.58 ; 613.59,643.09 613.87,643.37 v1(613.87,659.58) ; 711.07,1012.98 752.28,1012.98 756.87,1017.58 ; v1@756.87,927.58 757.87,928.58 757.87,973.58 757.87,1017.58
  Mid-Layer 2 w16: v1(560.87,545.58) 547.87,545.58 530.87,562.58 530.87,650.58 556.87,676.58 760.87,676.58 796.87,640.58 v1@796.87,544.58 ; v1(560.87,581.58) 560.87,595.18 593.83,628.14 694.32,628.14 v1(710.87,611.58) ; v1(610.87,600.58) 673.87,600.58 691.87,582.58 735.86,582.58 756.87,603.6 v1(756.87,616.58) ; v1(610.87,745.58) 720.87,855.58 v1(720.87,885.58) ; v1(610.87,1013.58) 650.87,973.58 v1@650.87,844.58 ; v1(613.87,659.58) 613.87,676.58 ; v1(755.87,885.58) 783.87,857.58 783.87,752.58 v1(756.87,725.58)
  Mid-Layer 4 w16: -41.33,-180.4 v1(-41.33,-145.4) ; 530.87,723.58 v1(610.87,723.58) ; v1(558.87,1022.58) 560.87,1024.58 560.87,1055.58 ; v1(560.87,928.58) 528.87,896.58 528.87,659.58 v1(611.87,576.58) ; v1(711.87,787.58) 782.87,787.58 783.87,786.58 ; v1@712.87,645.58 771.87,645.58 784.28,657.98 784.28,899.18 v1(757.87,925.58)
  Bottom Layer w10: v1(560.87,805.58) 710.87,955.58 ; 724.87,937.65 689.87,902.65 689.87,871.58 v1(755.87,805.58) ; 1041.58,-258.21 1075.43,-292.06 ; 1119.16,1029.93 1163.89,985.19
  Bottom Layer w20: v1(-51.33,-263.4) -39.33,-263.4
  other v1: 726.43,-742.06 1077.31,-742.06 726.43,-674.06 1077.31,-674.06 726.43,-606.06 1077.31,-606.06 726.43,-538.06 1077.31,-538.06 726.43,-470.06 1077.31,-470.06 294.44,-407.13 -8.83,-404.15 224.17,-404.15 726.43,-402.06 1077.31,-402.06 -8.83,-372.65 224.17,-372.65 726.43,-334.06 1077.31,-334.06 726.43,-266.06 1077.31,-266.06 267.67,-263.4 -7.33,-161.28 225.66,-161.28 -7.33,-129.78 225.66,-129.78 796.87,545.58 711.95,646.02 650.87,845.58

## Silkscreen, mask and mechanical layers (free items; w line width, h text height)
Mechanical 1:
  circle w3.94: c7070.28,3278.98 r29.53
  circle w3.94: c5038.8,6098.08 r29.53
  circle w3.94: c7515.18,6082.33 r29.53
  circle w3.94: c6715.9,6074.19 r29.53
  circle w3.94: c7519.11,5865.79 r29.53
  circle w3.94: c5026.99,5779.18 r29.53
  circle w3.94: c6007.28,3278.98 r29.53
  circle w3.94: c8133.27,3278.98 r29.53
  lines w2: 8212.01,5200.24 ccw(c8202.17,5200.24) 8202.17,5210.08 7956.1,5210.08 7956.1,5574.25 8202.17,5574.25 ccw(c8202.17,5584.09) 8212.01,5584.09
  lines w3.94: 8212.01,5200.24 8212.01,4615.24 7965.89,4615.24 7965.89,4422.68 8212.01,4422.68 8212.01,3278.98 cw(c8133.27,3278.98) 8133.27,3200.24 6007.28,3200.24 cw(c6007.28,3278.98) 5928.54,3278.98 5928.54,5601.81 ccw(c5849.8,5601.81) 5849.8,5680.55 4353.74,5680.55 cw(c4353.74,5759.29) 4275,5759.29 4275,6113.62 cw(c4353.74,6113.62) 4353.74,6192.36 8133.27,6192.36 cw(c8133.27,6113.62) 8212.01,6113.62 8212.01,5584.09 ; -42.36,-62.72 ccw(c-42.36,-62.72) -42.36,-62.72 ; 3526.97,3200.24 ccw(c3526.97,3200.24) 3526.97,3200.24 ; 4070,-103.35 ccw(c4070,-103.35) 4070,-103.35
  lines w10: 0,0 1181.1,0 1181.1,2755.91 0,2755.91 0,0 ; 2665.35,665.35 4633.86,665.35 4633.86,4051.18 2665.35,4051.18 2665.35,665.35